# Altium PCB module_wifi.PcbDoc
Units mil, origin at the board's own origin, x right, y up, seen from the top; angles counter-clockwise.
Board outline 2955.64 x 1640 mil, 2 copper layers (Top Layer, Bottom Layer); 50 components, 31 nets, 209 pads, 41 vias.
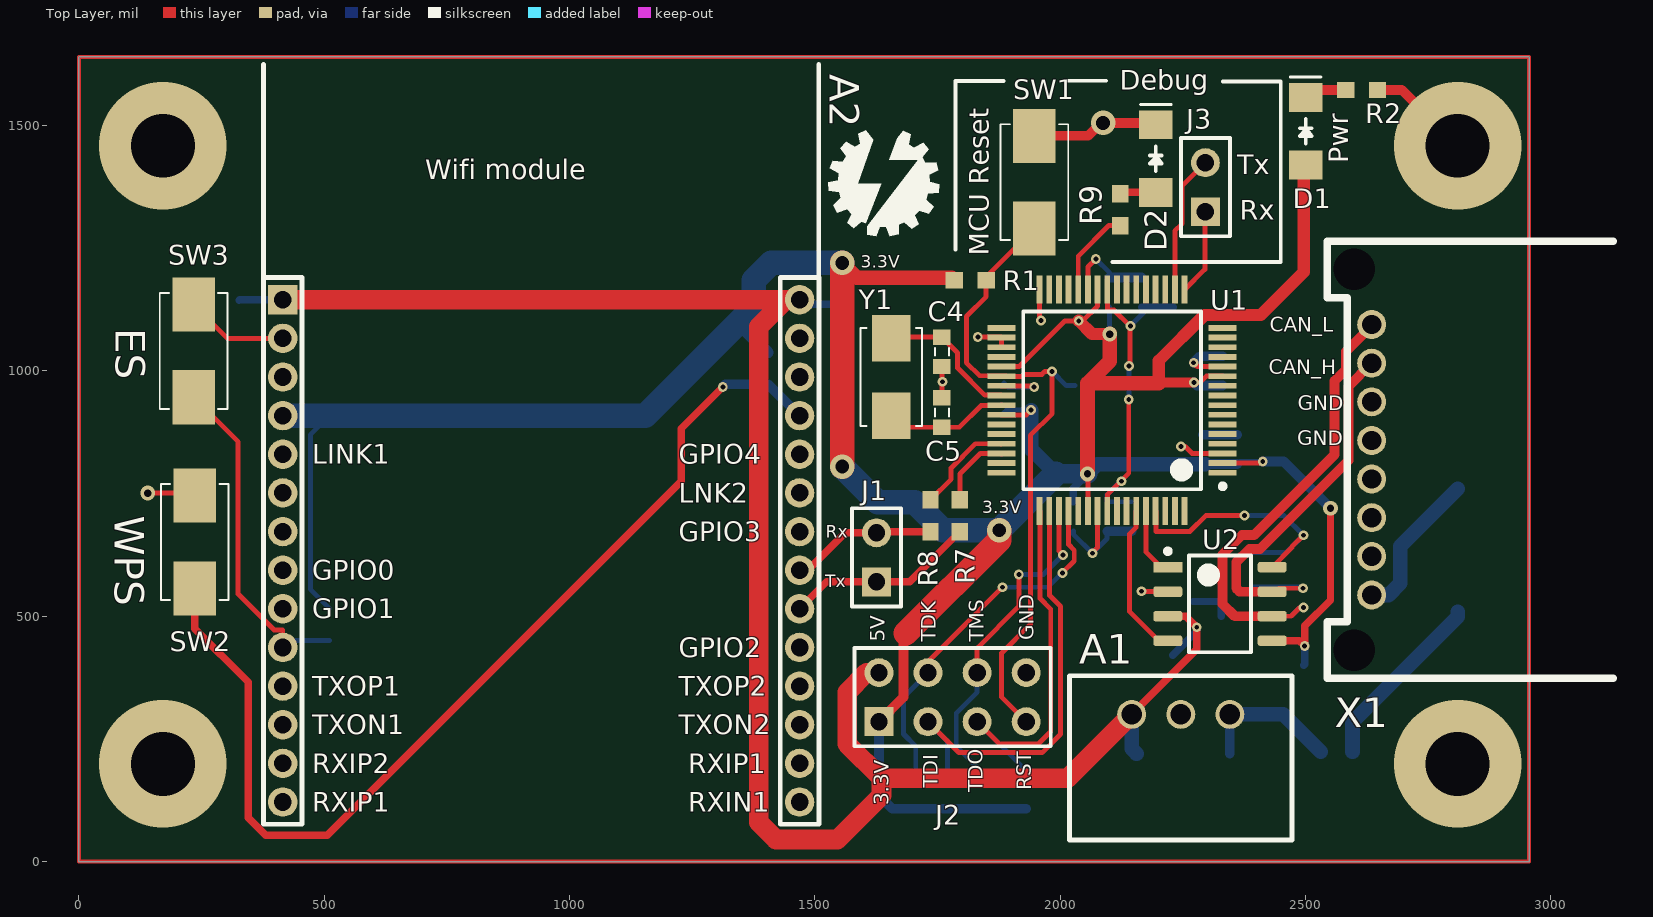
[diagram p0: Top Layer view]
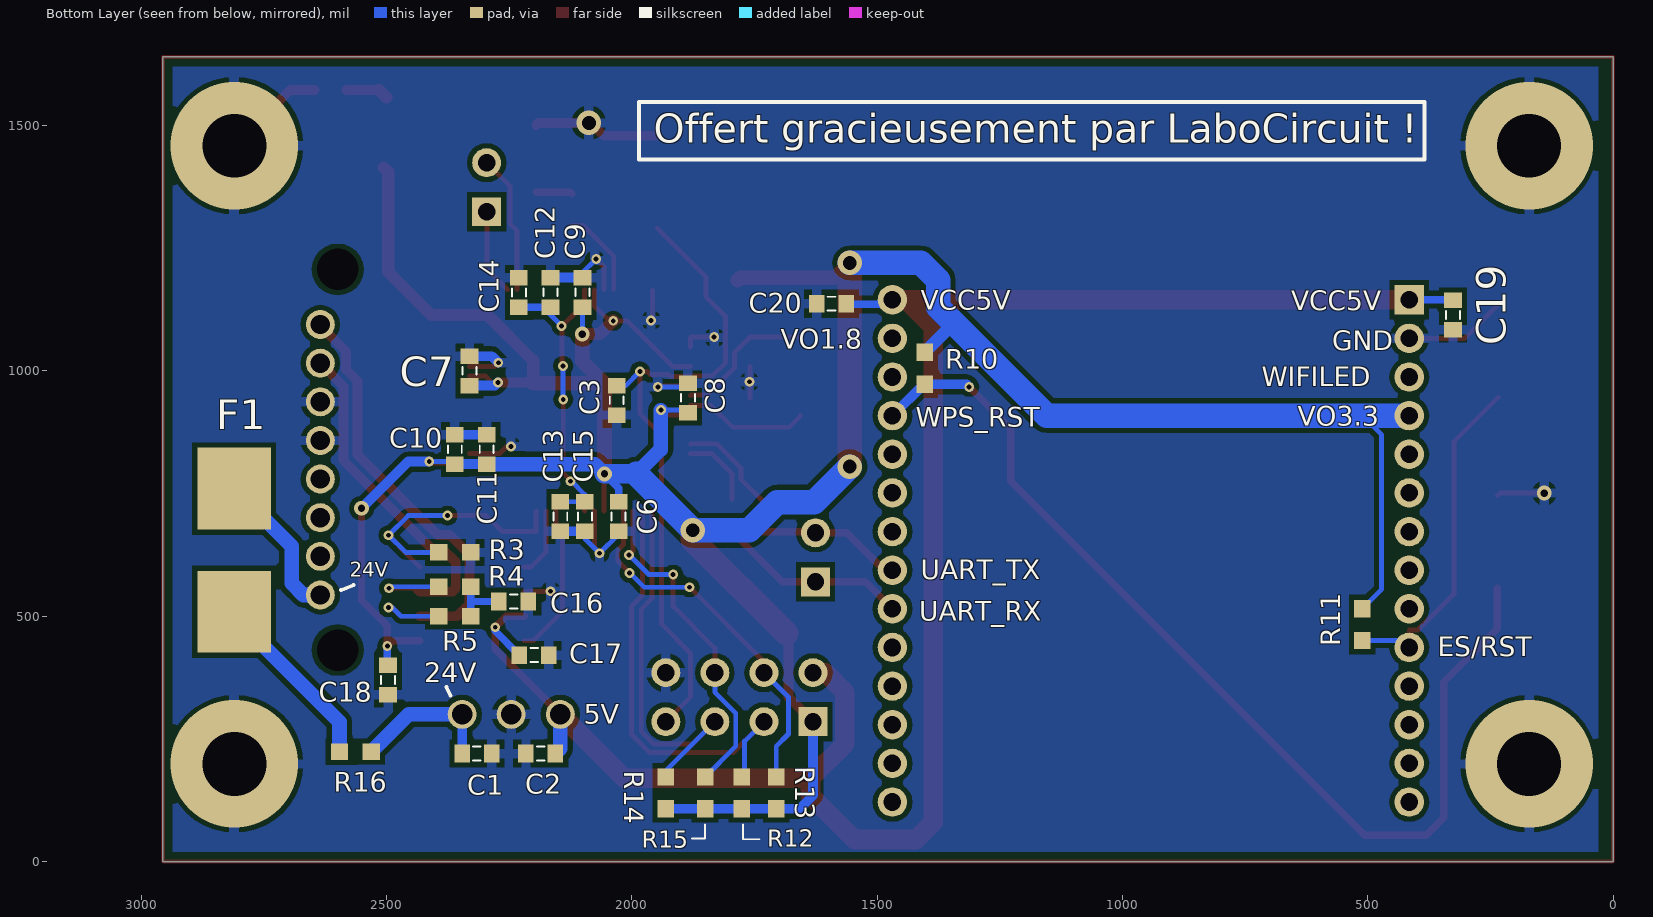
[diagram p1: Bottom Layer view, seen from below]

## Layer stack, top to bottom
Top Solder: solder mask 0.4, Solder Resist, Dk 3.5
Top Layer: signal copper 1.4
Dielectric 1: dielectric 12.6, FR-4, Dk 4.8
Bottom Layer: signal copper 1.4
Bottom Solder: solder mask 0.4, Solder Resist, Dk 3.5

## Board outline
0,0 0,1640 2955.64,1640 2955.64,0

## Design rules (kind name [scope] priority, off if disabled: settings)
Clearance [All] p1: gap=5
HoleSize [All] p1: absolutevalues=TRUE maxlimit=200 minlimit=8 maxpercent=80.000 minpercent=20.000
MinimumSolderMaskSliver [All] p1: minsoldermaskwidth=5
NetAntennae [All] p1: netantennaetolerance=10
PlaneConnect [All] p1: planeconnectstyle=Relief reliefexpansion=20 reliefentries=4 reliefconductorwidth=10 reliefairgap=15
PolygonConnect PolygonConnect_GND [InNet('GND') vs InNet('GND')] p1: connectstyle=Relief reliefconductorwidth=20 reliefentries=4 polygonreliefangle="90 Angle" airgapwidth=10
PolygonConnect [All] p2: connectstyle=Relief reliefconductorwidth=10 reliefentries=4 polygonreliefangle="90 Angle" airgapwidth=10
RoutingVias [All] p1: holewidth=15 width=30 viastyle="Through Hole" minholewidth=8 minwidth=16 maxholewidth=120 maxwidth=100
SilkToSilkClearance [All] p1: silktosilkclearance=0
SilkToSolderMaskClearance [IsPad] p1: minsilkscreentomaskgap=0 clearancetoexposedcopper=TRUE
SolderMaskExpansion [All] p1: expansion=4
Width [All] p1: maxlimit=100 minlimit=8 preferedwidth=15
24 further rules are at their usual default settings.

## Components (designator, comment, footprint, x,y, rotation, side; value= is the part's Value field where it differs from the comment)
A1 "5V DCDC" R-78E-0.5 2345.64,300 r180 top
A2 "HLK-RM04" HLK-RM04 415.64,1145 r0 top
C1 "CAP CER 0603 1uF 25V X7R 20%" C0603 2315.64,220 r0 bottom
C2 "CAP CER 0603 1uF 25V X7R 20%" C0603 2185.64,220 r180 bottom
C3 "CAP CER 0603 0.1uF 50V C0G 10%" C0603 2030.64,940 r90 bottom
C4 "CAP CER 0603 10pF 50V C0G 5%" C0603 1758.73,1038.92 r90 top
C5 "CAP CER 0603 10pF 50V C0G 5%" C0603 1758.73,915.1 r270 top
C6 "CAP CER 0603 0.1uF 50V C0G 10%" C0603 2026.75,703.33 r90 bottom
C7 "CAP CER 0603 0.1uF 50V C0G 10%" C0603 2330.64,1000 r270 bottom
C8 "CAP CER 0603 0.1uF 50V C0G 10%" C0603 1885.64,945 r270 bottom
C9 "CAP CER 0603 0.1uF 50V C0G 10%" C0603 2100.64,1160 r270 bottom
C10 "CAP CER 0603 0.01uF 50V X7R 10%" C0603 2360.64,840 r270 bottom
C11 "CAP CER 0603 1uF 25V X7R 20%" C0603 2295.64,840 r270 bottom
C12 "CAP CER 0603 0.1uF 50V C0G 10%" C0603 2165.64,1160 r270 bottom
C13 "CAP CER 0603 0.1uF 50V C0G 10%" C0603 2145.64,703.33 r90 bottom
C14 "CAP CER 0603 2.2uF 6.3V X7R 10%" C0603 2230.12,1159.73 r270 bottom
C15 "CAP CER 0603 1uF 25V X7R 20%" C0603 2095.64,703.33 r90 bottom
C16 "CAP CER 0603 47nF 50V X7R 10%" C0603 2240.64,530 r180 bottom
C17 "CAP CER 0603 2.2uF 6.3V X7R 10%" C0603 2199.01,420.67 r0 bottom
C18 "CAP CER 0603 0.1uF 50V C0G 10%" C0603 2496.51,370 r90 bottom
C19 "CAP CER 0603 2.2uF 6.3V X7R 10%" C0603 326.29,1113.74 r270 bottom
C20 "CAP CER 0603 2.2uF 6.3V X7R 10%" C0603 1592.93,1136.89 r180 bottom
D1 "Green" LED1206 2500.19,1488.65 r270 top
D2 "Green" LED1206 2194.73,1432.69 r270 top
F1 "Fuse Holder" Omni-Block_154T 2810.18,509.09 r90 bottom
J1 "Header for debugging" HDR1X2 1625.64,570 r90 top
J2 "JTAG" JTAG_Header 1630.64,285 r0 top
J3 "Header 2" HDR1X2 2295.79,1324.27 r90 top
R1 "RES 0603 10k 5% 0.1W" R0603 1816.64,1184.85 r180 top
R2 "RES 0603 220R 5% 1/4W" R0603 2614.11,1572.34 r180 top
R3 "RES 0603 10k 5% 0.1W" R0603 2360.64,630 r0 bottom
R4 "RES 0603 60R 1% 1/4W" R0603 2360.64,560 r0 bottom
R5 "RES 0603 60R 1% 1/4W" R0603 2360.64,500 r180 bottom
R7 "RES 0603 100R 5% 1/4W" R0603 1795.64,705 r90 top
R8 "RES 0603 100R 5% 1/4W" R0603 1735.64,705 r90 top
R9 "RES 0603 220R 5% 1/4W" R0603 2122.1,1328.48 r270 top
R10 "RES 0603 4.7k 5% 0.1W" R0603 1403.33,1005.09 r90 bottom
R11 "RES 0603 4.7k 5% 0.1W" R0603 511.18,483.08 r90 bottom
R12 "RES 0603 100k 5% 0.1W" R0603 1775.64,140 r270 bottom
R13 "RES 0603 100k 5% 0.1W" R0603 1705.64,140 r270 bottom
R14 "RES 0603 100k 5% 0.1W" R0603 1930.64,140 r270 bottom
R15 "RES 0603 100k 5% 0.1W" R0603 1850.64,140 r270 bottom
R16 "RES 0603 0R" R0603 2563.22,223.57 r180 bottom
SW1 "147873-1" 147873 1947.4,1384.51 r270 top
SW2 "147873-1" 147873 236.12,651.23 r90 top
SW3 "147873-1" 147873 233.81,1040.68 r270 top
U1 "Microconroller" LQFP64 2105.64,940 r180 top
U2 "CAN Transceiver" SOIC-8 2325.64,525 r0 top
X1 "34793-0080" 34791-0080 2634.7,818.85 r90 top
Y1 "NX5043GA-16.00MHz" NX5032GA 1655.73,987.56 r270 top

## Footprints (in the part's own frame and the unit in brackets; to place one, negate y for a bottom-side part, rotate by r counter-clockwise, add the part's x,y. Pads: shape width x height; smd on the part's side, far side on the other; paste and mask are expansions set on the pad)
34791-0080 [mm] "Molex Mini50, 8 position, single row"
  round 0 hole 2.15 unplated paste+0 mask+0: 0(-9.85,0.9) 0(9.85,0.9)
  round 1.5 hole 1: 1(-7,0) 2(-5,0) 3(-3,0) 4(-1,0) 5(1,0) 6(3,0) 7(5,0) 8(7,0)
  silkscreen extent -11.31,-12.5 11.31,2.3, body extent -11.31,-15.5 11.31,2.3, height 10.09
147873 [mm]
  rect 2.8x2.2 smd: 1(-2.4,0) 2(2.4,0)
  silkscreen extent -3,-1.75 3,1.75, body extent -3,-1.75 3,1.75, height 5
C0603 [mm] "Chip Capacitor, 2-Leads, Body 1,55x0,80mm, IPC Medium Density"
  rect 0.8x0.92 smd: 1(-0.762,0) 2(0.762,0)
  silkscreen extent -0.2,-0.36 0.2,0.36, body extent -0.8,-0.43 0.8,0.42, height 0.5
HDR1X2 [mm] "Connector; Header; 2 Position"
  rect 1.5x1.5 hole 0.9: 1(0,0)
  round 1.5 hole 0.9: 2(2.54,0)
  silkscreen extent -1.27,-1.27 3.81,1.27, body extent -1.27,-1.22 3.81,1.27, height 8.44
HLK-RM04 [mm] "Wifi Module"
  rect 1.524x1.524 hole 0.91: 1(0,0)
  round 1.524 hole 0.91: 2(0,-2) 3(0,-4) 4(0,-6) 5(0,-8) 6(0,-10) 7(0,-12) 8(0,-14) 9(0,-16) 10(0,-18) 11(0,-20) 12(0,-22) 13(0,-24) 14(0,-26) 15(26.75,-26) 16(26.75,-24) 17(26.75,-22) 18(26.75,-20) 19(26.75,-18) 20(26.75,-16) 21(26.75,-14) 22(26.75,-12) 23(26.75,-10) 24(26.75,-8) 25(26.75,-6) 26(26.75,-4) 27(26.75,-2) 28(26.75,0)
  silkscreen extent -1,-27.15 27.75,1.15
JTAG_Header [mm] "Programming header"
  rect 1.5x1.5 hole 0.9: 1(0,0)
  round 1.5 hole 0.9: 2(0,2.54) 3(2.54,0) 4(2.54,2.54) 5(5.08,0) 6(5.08,2.54) 7(7.62,0) 8(7.62,2.54)
  silkscreen extent -1.27,-1.27 8.89,3.81
LED1206 [mm] "LED 1206"
  rect 1.5x1.75 smd: 1(1.75,0) 2(-1.75,0)
  silkscreen extent -2.8,-0.8 0.65,0.8, body extent -1.6,-0.8 1.6,0.8, height 1.1
LQFP64 [mm] "TSQFP, 64-Leads, Body 10,00x10,00mm, Pitch 0,50mm, IPC Medium Density"
  rect 1.45x0.3 smd: 1(-5.725,3.75) 2(-5.725,3.25) 3(-5.725,2.75) 4(-5.725,2.25) 5(-5.725,1.75) 6(-5.725,1.25) 7(-5.725,0.75) 8(-5.725,0.25) 9(-5.725,-0.25) 10(-5.725,-0.75) 11(-5.725,-1.25) 12(-5.725,-1.75) 13(-5.725,-2.25) 14(-5.725,-2.75) 15(-5.725,-3.25) 16(-5.725,-3.75) 33(5.725,-3.75) 34(5.725,-3.25) 35(5.725,-2.75) 36(5.725,-2.25) 37(5.725,-1.75) 38(5.725,-1.25) 39(5.725,-0.75) 40(5.725,-0.25) 41(5.725,0.25) 42(5.725,0.75) 43(5.725,1.25) 44(5.725,1.75) 45(5.725,2.25) 46(5.725,2.75) 47(5.725,3.25) 48(5.725,3.75)
  rect 0.3x1.45 smd: 17(-3.75,-5.725) 18(-3.25,-5.725) 19(-2.75,-5.725) 20(-2.25,-5.725) 21(-1.75,-5.725) 22(-1.25,-5.725) 23(-0.75,-5.725) 24(-0.25,-5.725) 25(0.25,-5.725) 26(0.75,-5.725) 27(1.25,-5.725) 28(1.75,-5.725) 29(2.25,-5.725) 30(2.75,-5.725) 31(3.25,-5.725) 32(3.75,-5.725) 49(3.75,5.725) 50(3.25,5.725) 51(2.75,5.725) 52(2.25,5.725) 53(1.75,5.725) 54(1.25,5.725) 55(0.75,5.725) 56(0.25,5.725) 57(-0.25,5.725) 58(-0.75,5.725) 59(-1.25,5.725) 60(-1.75,5.725) 61(-2.25,5.725) 62(-2.75,5.725) 63(-3.25,5.725) 64(-3.75,5.725)
  silkscreen extent -5.85,-4.6 4.6,4.6, body extent -5,-5 5,5, height 1.45
NX5032GA [mm]
  rect 2.4x2 smd: 1(-2,0) 2(2,0)
  silkscreen extent -2.54,-1.6 2.54,1.6, body extent -2.54,-1.6 2.54,1.6, height 1.3
Omni-Block_154T [mm] "Omni-Block Fuse Holder"
  rect 4.24x3.81 smd: 1(0,0) 2(6.37,0)
  body extent -1.75,-2.4 7.95,2.6, height 3.74
R0603 [mm] "Chip Resistor, 2-Leads, Body 1,57x0,80mm, IPC Medium Density"
  rect 0.9x0.85 smd: 1(-0.825,0) 2(0.825,0)
  body extent -0.83,-0.43 0.82,0.43, height 0.5
R-78E-0.5 [mm] "Through hole DCDC"
  round 1.5 hole 1.05: 1(0,0) 2(2.54,0) 3(5.08,0)
  silkscreen extent -3.21,-2 8.29,6.5, body extent -3.2,-2 8.3,6.5, height 10.4
SOIC-8 [mm] "SOIC, 8-Leads, Body 4,90x3,90mm, Pitch 1,27mm, IPC Medium Density"
  rect 1.5x0.55 smd: 1(-2.7,1.905)
  rrect50% 1.5x0.55 smd: 2(-2.7,0.635) 3(-2.7,-0.635) 4(-2.7,-1.905) 5(2.7,-1.905) 6(2.7,-0.635) 7(2.7,0.635) 8(2.7,1.905)
  silkscreen extent -2.82,-2.5 1.6,2.85, body extent -2.95,-2.45 3.05,2.45, height 1.7

## Part data
A1: library part R78E5.0-0.5
A2: "Wifi Module"
C1 C2 C11 C15: "1uF ceramic capacitor"
C3 C6 C7 C8 C9 C12 C13 C18: "0.1uF ceramic capacitor"
C4 C5: "10pF ceramic capacitor"
C10: "0.01uF ceramic capacitor"
C14 C17 C19 C20: "2.2uF ceramic capacitor"
C16: "47nF ceramic capacitor"
D1 D2: library part LTST-C150KGKT, "Green LED 1206"
F1: library part 0154010.DR, "Nano 452 fuse holder, surface mount"
J1: library part "Header 2", "Header, 2-Pin"
J2: library part JTAG_Header, "JTAG header, MCU programming"
J3: "Header, 2-Pin"
R1 R3: "10 kOhms resistor"
R2 R9: "220 Ohms resistor, 1/4W"
R4 R5: "60 Ohms resistor, 1/4W"
R7 R8: "100 Ohms resistor, 1/4W"
R10 R11: "4.7 kOhms resistor"
R12 R13 R14 R15: "100 kOhm resistor"
R16: "0 Ohm resistor"
SW1 SW2 SW3: "Pushbutton switch SPST, 2 pins"
U1: library part TM4C123GN6PM, "32 bit Microcontroller"
U2: library part HVDA551-Q1, "Automotive 5-V CAN Transceiver with I/O Level Adapting and Low-Power Mode Supply Optimization"
X1: "Molex Mini50, 8 position, single row, right angle"
Y1: "Crystal Oscillator 16 MHz"

## Via types
v1: diameter 20, hole 10, Top Layer to Bottom Layer, 21 vias
v2: diameter 20, hole 10, Top Layer to Bottom Layer, tented both sides, 6 vias
v3: diameter 50, hole 28, Top Layer to Bottom Layer, 4 vias
v4: diameter 30, hole 15, Top Layer to Bottom Layer, 4 vias
v5: diameter 259.84, hole 129.92, Top Layer to Bottom Layer, 3 vias
v6: diameter 20, hole 10, Top Layer to Bottom Layer, tented top, 2 vias
v7: diameter 259.84/259.84 (per signal layer), hole 129.92, Top Layer to Bottom Layer, 1 vias

## Nets (pads, with @x,y where several pads share a name; then routed paths per layer and width w, separated by ;. In a path a pad name is that pad's centre, name@x,y a point inside that pad or via, vN(x,y) a via of type N, cw(c..) or ccw(c..) an arc to the next point about the centre after c; other vN are vias at no path point)
3.3V: A2.4 C6.2 C7.2 C8.2 C9.2 C10.2 C11.2 C18.2 D1.1 J2.1 R1.2 R10.2 R11.2 R12.2 R13.2 R14.2 R15.2 U1.2 U1.11 U1.26 U1.37 U1.42 U1.54 U2.5 | length 7177.2
  Top Layer w10: U1.42 1931.11,910.47 v1(1940.67,920.04) ; U1.37 1916.55,1008.9 2009.65,1102 v1(2037.82,1102) ; v1@2043.64,1102 2045.86,1102 2076.11,1132.25 U1.26 ; v4(2055.64,790) 2056.42,789.21 U1.54 ; v1(2272.39,976.5) 2285.17,976.5 2297.88,989.21 U1.11 ; U1.2 2409.58,812.05 v1(2412.74,815.2)
  Top Layer w15: U2.5 2487.39,450 v2(2498.19,439.21) ; v2@2498.42,439.21 2498.42,480.31 2550.64,532.52 v4(2550.64,720)
  Top Layer w20: J2.1 1680.64,335 1680.64,465 ; 2200.64,975 2202.14,976.5 ; 2200.64,976.5 v1(2272.39,976.5)
  Top Layer w25: v1(2037.82,1102) 2064.82,1075 v4(2100.64,1075) ; 2200.64,976.5 2200.64,1020.68 2293.99,1114.04 2408.58,1114.04 2496.2,1201.67 2496.2,1405.54 D1.1@2505.3,1414.64
  Top Layer w30: v3(1555.64,1220) 1585.64,1190 1779.01,1190 R1.2 ; v4(2055.64,790) 2055.64,975 ; v4(2100.64,1075) 2100.64,1020 2055.64,975 ; 2200.64,975 2055.64,975
  Top Layer w50: v3(1555.64,805) v3(1555.64,1220) ; 1685.64,465 1875.64,655 v3(1875.64,675)
  Bottom Layer w10: 510.94,908.78 471.72,869.57 471.72,555.02 R11.2 ; 1279.46,1033.82 1282.86,1033.82 ; C8.2 1890.67,920.04 v1(1940.67,920.04) ; C9.2 2100.64,1085 v4(2100.64,1075) v4@2110.64,1075 ; C10.2 2365.84,815.2 v1(2412.74,815.2)
  Bottom Layer w15: C6.2 2026.75,761.11 v4(2055.64,790) ; C18.2 2498.19,401.68 v2(2498.19,439.21)
  Bottom Layer w20: 955.64,908.78 958.14,908.78 ; J2.1 1630.64,135 1658.12,107.52 R13.2 R12.2 R15.2 R14.2 ; v1(2272.39,976.5) 2278.89,970 C7.2 ; C11.2 C10.2 ; v1(2412.74,815.2) 2455.43,815.2 v4(2550.64,720)
  Bottom Layer w25: 1346.64,1101.01 1346.64,1094.26 R10.2
  Bottom Layer w30: v1(1940.67,920.04) 1940.67,839.97 1990.64,790 ; v4(2055.64,790) 2075.64,810 C11.2
  Bottom Layer w40: 1990.64,790 v4(2055.64,790)
  Bottom Layer w50: A2.4 510.94,908.78 955.64,908.78 ; 958.14,908.78 1154.41,908.78 1279.46,1033.82 1346.64,1101.01 1375.64,1130 1375.64,1185 1410.64,1220 v3(1555.64,1220) ; v3(1555.64,805) 1628.11,732.53 1703.11,732.53 1760.64,675 v3(1875.64,675) 1990.64,790
5V: A1.3 A2.1 A2.28 C2.2 C17.2 C19.1 C20.2 J2.2 U2.3 | length 3978.7
  Top Layer w15: A1.3 2278.14,432.5 v6(2278.14,477.5) 2255.64,500 U2.3
  Top Layer w40: A2.1 A2.28@1440.64,1145 ; A2.28 A2.28@1440.64,1145 ; J2.2 1605.64,385 1565.64,345 1565.64,240 1635.64,170 ; A1.3 2015.64,170 1635.64,170 ; A2.28@1440.64,1145 1385.64,1090 1385.64,80 1420.64,45 1545.64,45 1635.64,135 1635.64,170
  Bottom Layer w15: C19.1 327.55,1145 A2.1 ; A2.28 1478.1,1135.68 C20.2@1564.82,1135.68 ; C17.2 2278.14,469.8 v6(2278.14,477.5)
  Bottom Layer w30: A1.3 2145.64,230 C2.2
24V: F1.2 X1.1 | length 309.5
  Bottom Layer w30: X1.1 2669.1,543.26 2692.98,567.14 2692.98,642.68 F1.2
CAN_H: R4.2 U2.7 X1.7 | length 832.5
  Top Layer w10: U2.7 2434.6,552.67 2437.85,549.41 2445.54,557.1 v1(2494.51,557.1)
  Top Layer w20: U2.7 2365.64,550 2358.64,557 2358.64,610.3 2385.64,637.3 2406.94,637.3 2587.17,817.53 2587.17,968.17 X1.7
  Bottom Layer w10: R4.2 2491.61,560 v1(2494.51,557.1)
CAN_L: R5.1 U2.6 X1.8 | length 1033.9
  Top Layer w10: U2.6 2470.33,500 2488.19,517.86 v1(2495.69,517.86)
  Top Layer w20: U2.6 2355.64,500 2330.64,525 2330.64,625.59 2370.34,665.3 2395.34,665.3 2559.17,829.13 2559.17,979.77 2582.34,1002.94 2582.34,1039.5 2620.96,1078.12 2634.7,1078.12 2618.39,1094.44 X1.8
  Bottom Layer w10: R5.1 2470.33,500 2488.19,517.86 v1(2495.69,517.86)
CAN_RX: U1.59 U2.4 | length 313.3
  Top Layer w10: U1.59 2154.07,713.83 2154.07,680.68 2141.51,668.12 2141.51,509.12 2200.64,450 U2.4
CAN_TX: U1.60 U2.1 | length 141.2
  Top Layer w10: U1.60 2174.53,631.1 2205.64,600 U2.1
GND: A1.2 A2.2 C1.1 C2.1 C3.1 C4.1 C5.1 C6.1 C7.1 C8.1 C9.1 C10.1 C11.1 C12.1 C13.1 C14.1 C15.1 C16.2 C17.1 C18.1 C19.2 C20.1 D2.2 J2.8 R2.1 R3.1 SW1.1 SW2.2 SW3.1 U1.3 U1.12 U1.27 U1.32 U1.34 U1.35 U1.39 U1.55 U2.2 X1.5 X1.6 | length 1937
  Top Layer w10: v4(140.18,750.98) 230.86,750.98 SW2.2 ; SW3.1 302.72,1066.26 A2.2 ; C5.1 1758.73,976.17 v1(1760.32,977.76) 1758.73,979.36 C4.1 ; v1(1832.02,1069.1) 1832.39,1068.73 1879.46,1068.73 U1.34 U1.35 ; U1.39 1944.7,969.53 v1(1946.89,967.33) ; U1.32 1958,1105.44 v1(1960.64,1102.8) ; U1.27 2056.42,1211.67 v1(2072.54,1227.78) ; v1(2065.77,628.43) 2065.77,630.13 2076.11,640.47 U1.55 ; v2(2165.37,550.87) 2166.24,550 U2.2 ; v1(2246.37,845.89) 2254.74,845.89 2268.9,831.73 U1.3 ; v1(2271.93,1016.62) 2279.66,1008.9 U1.12
  Top Layer w20: SW1.1 2056.83,1479 2094.27,1516.44 2105.39,1505.32 v3(2087.36,1505.32) 2190.78,1505.32 D2.2@2194.73,1501.37 ; R2.1 2696.13,1572.5 v7(2809.84,1458.79)
  Bottom Layer w10: C8.1 1893.3,967.33 v1(1946.89,967.33) ; C6.1 2026.75,667.45 v1(2065.77,628.43) 2095.64,658.3 C15.1 ; v1(2072.54,1227.78) 2072.85,1227.78 2100.64,1200 C9.1
  Bottom Layer w20: C15.1 C13.1 ; C9.1 C12.1 ; v1(2271.93,1016.62) 2285.31,1030 C7.1 ; C11.1@2290.64,870 C11.1 C10.1
  other v5: 171.36,198.95 2809.84,198.95 171.36,1458.79
NetA1_1: A1.1 C1.2 R16.2 | length 296.8
  Bottom Layer w20: C1.2 A1.1
  Bottom Layer w30: A1.1 2454.31,300 R16.2
NetA2_10: A2.10 R11.1 SW3.2 | length 697.1
  Top Layer w10: SW3.2 324.53,855.48 324.53,545.37 397.82,472.08 415.64,472.08 A2.10
  Bottom Layer w10: A2.10 429.89,450.6 R11.1
NetA2_25: A2.25 R10.1 SW2.1 | length 2121.1
  Top Layer w15: SW2.1 236.12,474.82 345.08,365.86 345.08,89.59 381.22,53.45 506.1,53.45 1227.71,775.07 1227.71,882.57 v6(1312.38,967.24)
  Bottom Layer w20: v6(1312.38,967.24) 1317.76,972.61 R10.1 1404.95,972.61 A2.25
NetC4_2: C4.2 U1.40 Y1.1 | length 292.9
  Top Layer w10: Y1.1 1658.36,1068.92 C4.2 1790.7,1036.96 1790.7,1006.24 1846.31,950.62 1879.46,950.62 U1.40
NetC5_2: C5.2 U1.41 Y1.2 | length 253
  Top Layer w10: Y1.2 1679.45,885.1 C5.2 1794.42,885.1 1838.7,929.38 1879.46,929.38 U1.41
NetC12_2: C12.2 C13.2 C14.2 C15.2 U1.25 U1.56 | length 719.9
  Top Layer w10: U1.56 2096.57,715.39 2096.57,748.53 2139.63,791.59 v2(2139.63,941.86) ; U1.25 2096.57,1164.61 2096.57,1123.85 2109.5,1123.85 v2@2142.43,1090.92 ; v2(2140,1010) 2142.13,1012.13 2142.13,1090.62 v2@2142.43,1090.92 ; v2(2143.01,1091.5) v2@2142.43,1090.92
  Bottom Layer w10: v2(2125,775) 2122.69,775 2095.64,747.94 C15.2 C13.2 ; v2(2139.63,941.86) 2139.63,942.28 2140,942.65 v2(2140,1010) ; v2(2143.01,1091.5) 2168.77,1117.26 2165.64,1117.26 C12.2
  Bottom Layer w15: C12.2 2229.86,1130 C14.2
NetC16_1: C16.1 R4.1 R5.2 | length 117.5
  Bottom Layer w15: C16.1 2328.15,530 ; R5.2 2328.15,530 ; R4.1 2328.15,530
NetD1_2: D1.2 R2.2 | length 87.6
  Top Layer w20: D1.2@2515.13,1572.5 R2.2
  Top Layer w25: D1.2 D1.2@2515.13,1572.5
NetD2_1: D2.1 R9.1 | length 73.8
  Top Layer w15: R9.1 2124.93,1363.79 D2.1
NetF1_1: F1.1 R16.1 | length 374.4
  Bottom Layer w30: R16.1 2595.7,284.54 2810.18,499.02 F1.1
NetR7_2: R7.2 U1.46 | length 155.2
  Top Layer w10: R7.2 1795.64,790 1837.37,831.73 U1.46 U1.46@1880.24,830.95
NetR8_2: R8.2 U1.45 | length 206.1
  Top Layer w10: R8.2 1777.64,779.48 1777.64,802 1827.05,851.42 U1.45 U1.45@1879.46,850.64
NetR9_2: R9.2 U1.28 | length 179.8
  Top Layer w10: U1.28 2036.74,1233.91 2099.36,1296.53 R9.2@2122.1,1296.53
RST: C3.2 J2.7 R1.1 SW1.2 U1.38 | length 1357.7
  Top Layer w10: J2.7 1880.64,335 1880.64,425 1939.09,483.46 1939.09,868.46 1983.44,912.8 v1(1983.44,998.84) 1968.47,998.84 1962.64,993 1926.11,993 1921.54,988.43 1890.64,988.43 1889.08,989.99 1835.64,989.99 1808.7,1016.94 1808.7,1110.85 1849.12,1151.27 R1.1 1849.12,1191.75 SW1.2
  Bottom Layer w10: v1(1983.44,998.84) 2012.28,970 C3.2
RXD: J3.1 U1.17 | length 175.9
  Top Layer w10: U1.17 2294.74,1206.86 J3.1@2294.74,1324.16
STB_MODE: R3.2 U1.61 U2.8 | length 580.7
  Top Layer w10: U1.61 2195,713.83 2195,673.06 2264.56,673.06 2296.5,705 v1(2375.64,705) ; U2.8 2471.93,640 2471.93,641.3 v1(2495.64,665)
  Bottom Layer w10: v1(2375.64,705) 2455.64,705 v1(2495.64,665) 2460.64,630 R3.2
TCK: J2.4 R13.1 U1.52 | length 755.8
  Top Layer w10: J2.4 1730.64,407.43 v1(1882.18,558.97) ; v1(2004.39,588.36) 2028.64,612.6 2028.64,634.53 2017.05,646.11 U1.52
  Bottom Layer w10: R13.1 1705.64,235 1680.64,260 1680.64,335 J2.4 ; v1(1882.18,558.97) 1974.6,558.97 2003.99,588.36 v1(2004.39,588.36)
TDI: J2.3 R12.1 U1.50 | length 907.4
  Top Layer w10: J2.3 1793.64,222 1963.09,222 2000.64,259.54 2000.64,520 1978.46,542.17 1978.46,713.83 U1.50
  Bottom Layer w10: J2.3 1770.11,245.53 1770.11,178.01 R12.1
TDO: J2.5 R14.1 U1.49 | length 791.9
  Top Layer w10: J2.5 1875.64,240 1955.64,240 1980.64,265 1980.64,514.54 1958.78,536.4 1958.78,713.83 U1.49
  Bottom Layer w10: J2.5 1930.64,185 R14.1
TMS: J2.6 R15.1 U1.51 | length 690.8
  Top Layer w10: J2.6 1830.64,435 1915.64,520 v1(1915.64,585) ; U1.51 1997.37,633.27 v1(2005.64,625)
  Bottom Layer w10: J2.6 1830.64,345.14 1788.11,302.62 1788.11,235.01 R15.1 ; v1(1915.64,585) 1965.64,585 v1(2005.64,625)
TXD: J3.2 U1.18 | length 285.7
  Top Layer w10: U1.18@2234.37,1166.17 U1.18 2233.59,1285.22 2248.54,1300.18 2248.54,1377.02 J3.2
WIFI_UART_RX: A2.20 J1.1 R7.1 | length 392.1
  Top Layer w15: A2.20 1523.71,570 J1.1 1693.12,570 R7.1
WIFI_UART_TX: A2.21 J1.2 R8.1 | length 299.4
  Top Layer w15: A2.21 1485.52,593.82 1561.71,670 J1.2 1628.15,672.52 R8.1
pads on no net: A2.3 A2.5 A2.6 A2.7 A2.8 A2.9 A2.11 A2.12 A2.13 A2.14 A2.15 A2.16 A2.17 A2.18 A2.19 A2.22 A2.23 A2.24 A2.26 A2.27 U1.1 U1.4 U1.5 U1.6 U1.7 U1.8 U1.9 U1.10 U1.13 U1.14 U1.15 U1.16 U1.19 U1.20 U1.21 U1.22 U1.23 U1.24 U1.29 U1.30 U1.31 U1.33 U1.36 U1.43 U1.44 U1.47 U1.48 U1.53 U1.57 U1.58 U1.62 U1.63 U1.64 X1.0 X1.2 X1.3 X1.4
copper on no net: | length 9191.3
  Top Layer w8: 0,0 0,1640 2955.64,1640 2955.64,0 0,0

## Polygon pours and split planes (outlines as drawn)
GND on Bottom Layer "GROUND_PLANE" (solid, remove dead copper, pour order 4): 2935.64,20 2935.64,1620 30.64,1620 30.64,20

## Other copper
Top Layer:
  text ".Layer_Name" at -875.37,992.42 h40
Bottom Layer:
  text ".Layer_Name" at -863.27,856.85 h40

## Silkscreen, mask and mechanical layers (free items; w line width, h text height)
Top Overlay:
  region: 1680.32,1489.42 1667.76,1474.21 1651.85,1430.39 1710.61,1429.97 1606.5,1294.88 1606.36,1277.72 1624.64,1274.09 1632.18,1293.49 1645.01,1293.21 1652.83,1274.65 1671.39,1278.42 1670.83,1297.67 1682.56,1303.12 1697.49,1289.44 1712.14,1298.79 1703.49,1316.79 1712.98,1326.56 1732.52,1320.14 1742.28,1334.94 1727.35,1348.33 1730.42,1360.61 1752.33,1362.99 1753.03,1380.71 1734.47,1385.73 1732.65,1399.83 1751.63,1409.18 1746.89,1424.67 1725.4,1424.11 1718.84,1435 1731.68,1452.02 1720.37,1465 1701.95,1454.25 1690.93,1462.21 1695.81,1482.17
  region: 1603.85,1490.42 1588.31,1483.75 1592.28,1463.14 1581.73,1456.47 1563.65,1466.69 1551.91,1454.02 1564.33,1437.72 1556.64,1425.89 1536.11,1427.87 1530.73,1412.74 1548.26,1402.38 1547.37,1388.87 1527.35,1384.04 1528.55,1366.98 1549.2,1364.14 1552.34,1352.77 1537.83,1337.96 1546.06,1322.55 1565.96,1329.43 1574.93,1319.41 1565.66,1301.6 1578.82,1291.13 1594.53,1304.15 1604.11,1301.3 1634.78,1381.35 1586.9,1381.35 1618.62,1470.97
  lines w7.87: 1786.62,1247.68 1786.62,1591.05 1884.64,1591.05 ; 2014.31,1591.12 2093.18,1591.12 ; 2105.9,1222.24 2449.35,1222.24 2449.35,1589.78 2331.61,1589.78
  lines w9.45: 376.27,1190.28 376.27,1624.92 ; 1508.02,1624.92 1508.15,1624.92 1508.15,1190.28
  text "Debug" at 2121.53,1573.21 h40
  text "Pwr" at 2586.92,1422.92 h40 r90
  text "Tx" at 2361.21,1400.5 h40
  text "Wifi module" at 705.55,1390.46 h40
  text "Rx" at 2366.12,1307.97 h40
  text "MCU Reset" at 1854.28,1234.49 h40 r90
  text "3.3V" at 1593.67,1210.07 h25
  text ".Layer_Name" at -872.95,1147.36 h40
  text "ES" at 74.87,1086.8 h60 r270
  text "CAN_L" at 2427.4,1079.77 h30
  text "CAN_H" at 2425.1,993.08 h30
  text "GND" at 2484.47,919.63 h30
  text "GND" at 2482.64,848.86 h30
  text "3.3V" at 1840.77,709.44 h25
  text "WPS" at 73.64,705.02 h60 r270
  text "Rx" at 1521.86,659.69 h25
  text "Tx" at 1521.57,559.16 h25
Bottom Overlay:
  lines w3.94: 1739.25,45.48 1773.52,45.48 1773.52,75.42 ; 1850.73,75.42 1850.73,46.66 1877.52,46.66
  lines w7.87: 2369.15,337.81 2377.74,355.76 ; 2567.4,563.38 2592.38,553.23 ; 384.4,1431.05 384.4,1548.05 1985.49,1548.05 1985.49,1431.05 384.4,1431.05
  text "Offert gracieusement par LaboCircuit !" at 1955.16,1465.31 h59.06
  text ".Layer_Name" at -868.11,699.49 h40
  text "24V" at 2574.43,580.55 h30
  text "24V" at 2423.01,365.91 h40
  text "5V" at 2097.37,281.07 h40
Top Paste:
  text ".Layer_Name" at -870.02,1221.2 h40
Bottom Paste:
  text ".Layer_Name" at -868.11,617.18 h40
Top Solder:
  text ".Layer_Name" at -872.95,1069.89 h40
Bottom Solder:
  text ".Layer_Name" at -865.69,781.8 h40

## Dimensions
0,1640 to 2955.64,1640 on Top Layer
0,1640 to 0,0 on Top Layer

## Text inside footprints (layer, text, board x,y; h text height)
A2: Top Overlay "LINK1" at 475.64,810.35 h39.37; Top Overlay "GPIO0" at 475.64,574.13 h39.37; Top Overlay "GPIO1" at 475.64,495.39 h39.37; Top Overlay "TXOP1" at 475.64,337.91 h39.37; Top Overlay "TXON1" at 475.64,259.17 h39.37; Top Overlay "RXIP2" at 475.64,180.43 h39.37; Top Overlay "RXIP1" at 475.64,101.69 h39.37; Top Overlay "GPIO4" at 1222.72,810.35 h39.37; Top Overlay "LNK2" at 1222.72,731.61 h39.37; Top Overlay "GPIO3" at 1222.72,652.87 h39.37; Top Overlay "GPIO2" at 1222.72,416.65 h39.37; Top Overlay "TXOP2" at 1222.72,337.91 h39.37; Top Overlay "TXON2" at 1222.72,259.17 h39.37; Top Overlay "RXIP1" at 1242.41,180.43 h39.37; Top Overlay "RXIN1" at 1242.41,101.69 h39.37; Bottom Overlay "VCC5V" at 655.88,1123.52 h39.37; Bottom Overlay "GND" at 572.36,1042.23 h39.37; Bottom Overlay "VO3.3" at 642.52,888.56 h39.37; Bottom Overlay "VO1.8" at 1696.12,1044.6 h39.37; Bottom Overlay "VCC5V" at 1410.78,1124.75 h39.37; Bottom Overlay "ES/RST" at 357.08,418.07 h39.37; Bottom Overlay "UART_RX" at 1414.28,491.01 h39.37; Bottom Overlay "UART_TX" at 1411.31,575.49 h39.37; Bottom Overlay "WPS_RST" at 1421.56,885.95 h39.37; Bottom Overlay "WIFILED" at 716.01,968.73 h39.37
J2: Top Overlay "5V" at 1642.05,448.48 h30 r90; Top Overlay "RST" at 1940.64,145 h30 r90; Top Overlay "TMS" at 1844.3,447.5 h30 r90; Top Overlay "TDO" at 1842.13,141.74 h30 r90; Top Overlay "TDI" at 1749.97,150.41 h30 r90; Top Overlay "TDK" at 1746.72,447.5 h30 r90; Top Overlay "3.3V" at 1650.64,115 h30 r90; Top Overlay "GND" at 1946.22,450.75 h30 r90